# Altium PCB PCB1.PcbDoc
Units mm, origin at the board's own origin, x right, y up, seen from the top; angles counter-clockwise.
Board outline 77.34 x 133.99 mm, 2 copper layers (Top Layer, Bottom Layer); 15 components, 14 nets, 152 pads, 0 vias.
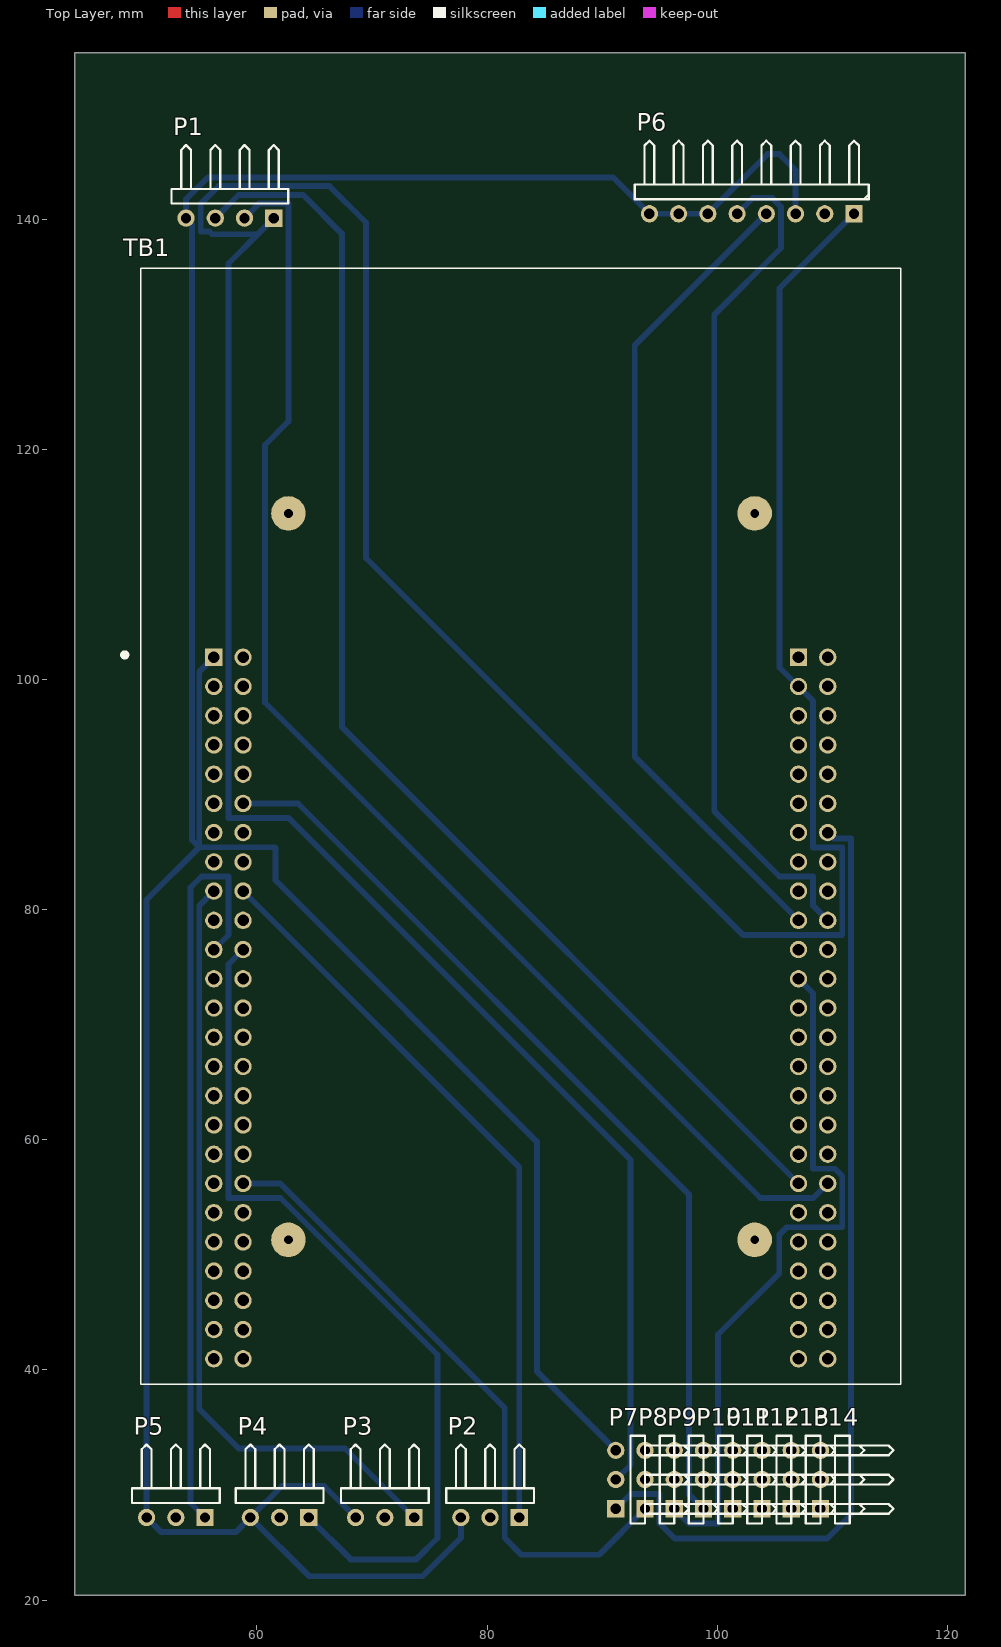
[diagram p0: Top Layer view]
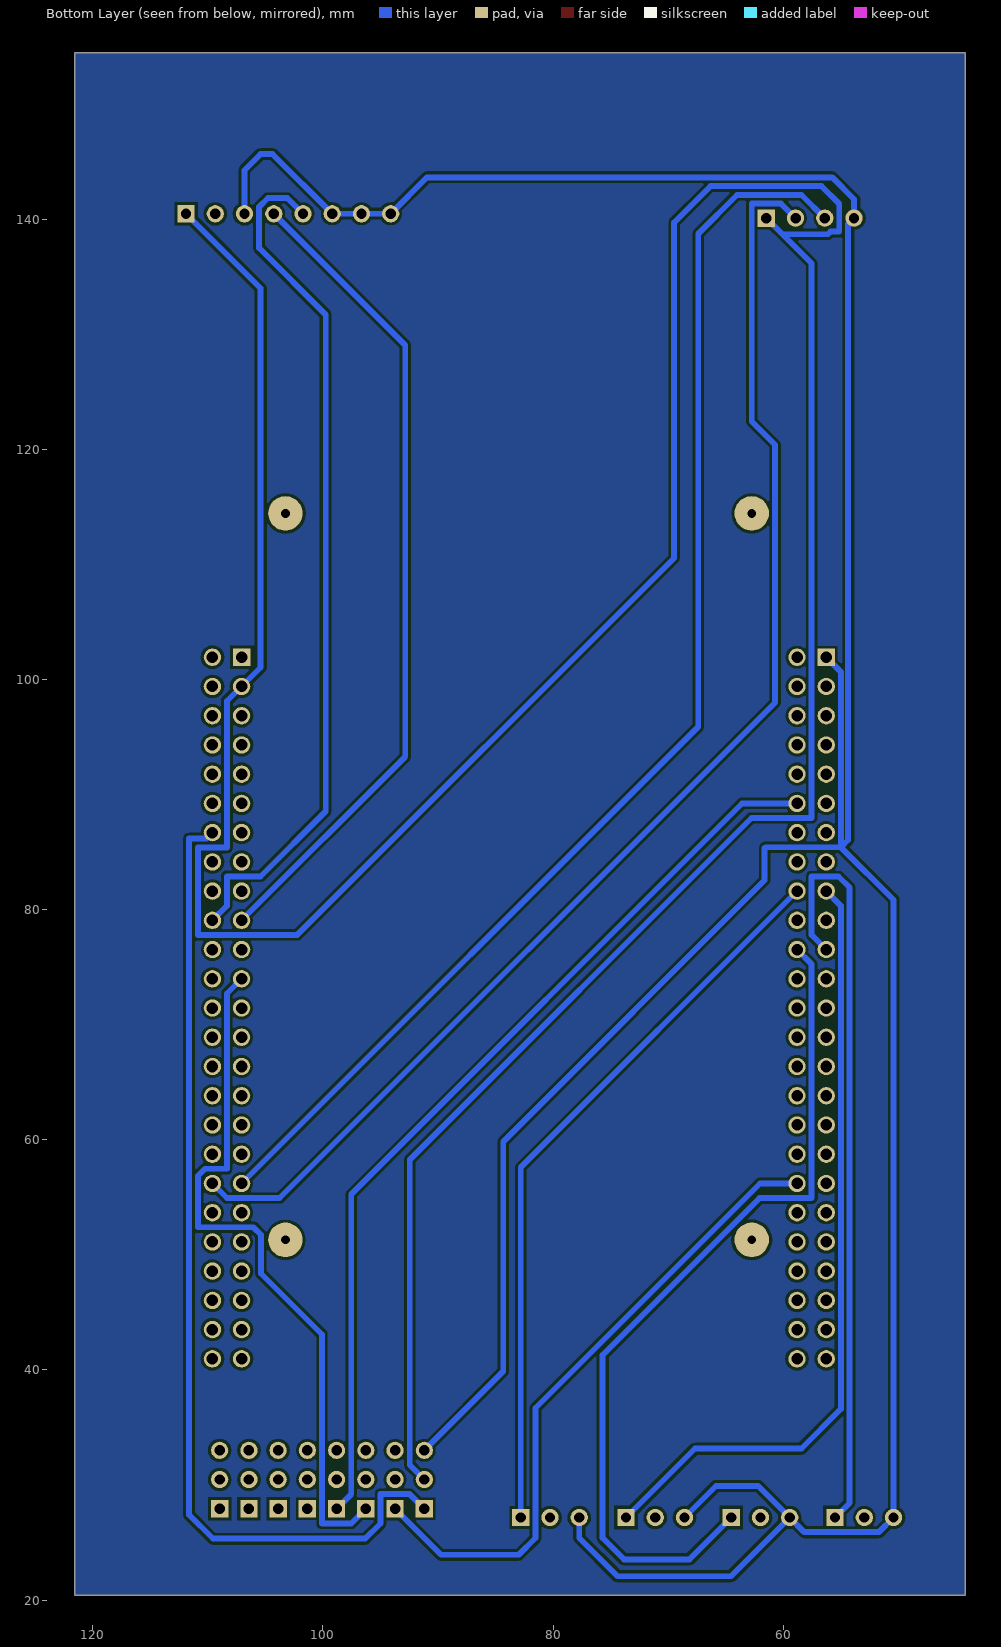
[diagram p1: Bottom Layer view, seen from below]

## Layer stack, top to bottom
Top Solder: solder mask 0.0102, Solder Resist, Dk 3.5
Top Layer: signal copper 0.0356
Dielectric 1: dielectric 0.32, FR-4, Dk 4.8
Bottom Layer: signal copper 0.0356
Bottom Solder: solder mask 0.0102, Solder Resist, Dk 3.5

## Board outline
44.196,20.447 121.539,20.447 121.539,154.432 44.196,154.432

## Design rules (kind name [scope] priority, off if disabled: settings)
Clearance [All] p1: gap=0.254 ignorepadtopadclearanceinfootprint=FALSE except(0: Arc-Hole Track-Hole SMDPad-Hole THPad-Hole Via-Hole Fill-Hole Poly-Hole Region-Hole Text-Hole)
PolygonConnect [All] p1: connectstyle=Relief reliefconductorwidth=0.254 reliefentries=4 polygonreliefangle="90 Angle" airgapwidth=0.254
RoomDefinition Sch [InComponentClass('Sch')] p1: confinementstyle=ConfineIn formatcopy=TRUE lockcomponents=FALSE outline 178.943,26.797 373.634,26.797 373.634,127.381 178.943,127.381
RoutingVias [All] p1: holewidth=0.711 width=1.27 viastyle="Through Hole" minholewidth=0.711 minwidth=1.27 maxholewidth=0.711 maxwidth=1.27
SolderMaskExpansion [All] p1: expansion=0.102
Width [All] p1: maxlimit=0.508 minlimit=0.508 preferedwidth=0.508
30 further rules are at their usual default settings.

## Components (designator, comment, footprint, x,y, rotation, side; value= is the part's Value field where it differs from the comment)
P1 "Header 4H" HDR1X4H 61.468,140.081 r180 top
P2 "Header 3H" HDR1X3H 82.804,27.178 r180 top
P3 "Header 3H" HDR1X3H 73.66,27.178 r180 top
P4 "Header 3H" HDR1X3H 64.516,27.178 r180 top
P5 "Header 3H" HDR1X3H 55.499,27.178 r180 top
P6 "Header 8H" HDR1X8H 111.887,140.462 r180 top
P7 "Header 3H" HDR1X3H 91.186,27.94 r90 top
P8 "Header 3H" HDR1X3H 93.726,27.94 r90 top
P9 "Header 3H" HDR1X3H 96.266,27.94 r90 top
P10 "Header 3H" HDR1X3H 98.806,27.94 r90 top
P11 "Header 3H" HDR1X3H 101.346,27.94 r90 top
P12 "Header 3H" HDR1X3H 103.886,27.94 r90 top
P13 "Header 3H" HDR1X3H 106.426,27.94 r90 top
P14 "Header 3H" HDR1X3H 108.966,27.94 r90 top
TB1 "STM32F4DISCOVERY" *MODULE_STM32F4DISCOVERY_STM32F4DISCOVERY(Primary) 82.931,87.249 r0 top

## Footprints (in the part's own frame and the unit in brackets; to place one, negate y for a bottom-side part, rotate by r counter-clockwise, add the part's x,y. Pads: shape width x height; smd on the part's side, far side on the other; paste and mask are expansions set on the pad)
*MODULE_STM32F4DISCOVERY_STM32F4DISCOVERY(Primary) [mm]
  rect 1.508x1.508 hole 1: P1_1(-26.67,14.68) P2_1(24.13,14.68)
  round 1.508 hole 1: P1_2(-24.13,14.68) P1_3(-26.67,12.14) P1_4(-24.13,12.14) P1_5(-26.67,9.6) P1_6(-24.13,9.6) P1_7(-26.67,7.06) P1_8(-24.13,7.06) P1_9(-26.67,4.52) P1_10(-24.13,4.52) P1_11(-26.67,1.98) P1_12(-24.13,1.98) P1_13(-26.67,-0.56) P1_14(-24.13,-0.56) P1_15(-26.67,-3.1) P1_16(-24.13,-3.1) P1_17(-26.67,-5.64) P1_18(-24.13,-5.64) P1_19(-26.67,-8.18) P1_20(-24.13,-8.18) P1_21(-26.67,-10.72) P1_22(-24.13,-10.72) P1_23(-26.67,-13.26) P1_24(-24.13,-13.26) P1_25(-26.67,-15.8) P1_26(-24.13,-15.8) P1_27(-26.67,-18.34) P1_28(-24.13,-18.34) P1_29(-26.67,-20.88) P1_30(-24.13,-20.88) P1_31(-26.67,-23.42) P1_32(-24.13,-23.42) P1_33(-26.67,-25.96) P1_34(-24.13,-25.96) P1_35(-26.67,-28.5) P1_36(-24.13,-28.5) P1_37(-26.67,-31.04) P1_38(-24.13,-31.04) P1_39(-26.67,-33.58) P1_40(-24.13,-33.58) P1_41(-26.67,-36.12) P1_42(-24.13,-36.12) P1_43(-26.67,-38.66) P1_44(-24.13,-38.66) P1_45(-26.67,-41.2) P1_46(-24.13,-41.2) P1_47(-26.67,-43.74) P1_48(-24.13,-43.74) P1_49(-26.67,-46.28) P1_50(-24.13,-46.28) P2_2(26.67,14.68) P2_3(24.13,12.14) P2_4(26.67,12.14) P2_5(24.13,9.6) P2_6(26.67,9.6) P2_7(24.13,7.06) P2_8(26.67,7.06) P2_9(24.13,4.52) P2_10(26.67,4.52) P2_11(24.13,1.98) P2_12(26.67,1.98) P2_13(24.13,-0.56) P2_14(26.67,-0.56) P2_15(24.13,-3.1) P2_16(26.67,-3.1) P2_17(24.13,-5.64) P2_18(26.67,-5.64) P2_19(24.13,-8.18) P2_20(26.67,-8.18) P2_21(24.13,-10.72) P2_22(26.67,-10.72) P2_23(24.13,-13.26) P2_24(26.67,-13.26) P2_25(24.13,-15.8) P2_26(26.67,-15.8) P2_27(24.13,-18.34) P2_28(26.67,-18.34) P2_29(24.13,-20.88) P2_30(26.67,-20.88) P2_31(24.13,-23.42) P2_32(26.67,-23.42) P2_33(24.13,-25.96) P2_34(26.67,-25.96) P2_35(24.13,-28.5) P2_36(26.67,-28.5) P2_37(24.13,-31.04) P2_38(26.67,-31.04) P2_39(24.13,-33.58) P2_40(26.67,-33.58) P2_41(24.13,-36.12) P2_42(26.67,-36.12) P2_43(24.13,-38.66) P2_44(26.67,-38.66) P2_45(24.13,-41.2) P2_46(26.67,-41.2) P2_47(24.13,-43.74) P2_48(26.67,-43.74) P2_49(24.13,-46.28) P2_50(26.67,-46.28)
  silkscreen extent -34.61,-48.5 33,48.5
HDR1X3H [mm] "Connector; Header; 3 Position; Right Angle"
  rect 1.5x1.5 hole 0.9: 1(0,0)
  round 1.5 hole 0.9: 2(2.54,0) 3(5.08,0)
  silkscreen extent -1.27,-6.35 6.35,-1.27
HDR1X4H [mm] "Connector; Header; 4 Position; Right Angle"
  rect 1.5x1.5 hole 0.9: 1(0,0)
  round 1.5 hole 0.9: 2(2.54,0) 3(5.08,0) 4(7.62,0)
  silkscreen extent -1.27,-6.35 8.89,-1.27
HDR1X8H [mm] "Connector; Header; 8 Position; Right Angle"
  rect 1.5x1.5 hole 0.9: 1(0,0)
  round 1.5 hole 0.9: 2(2.54,0) 3(5.08,0) 4(7.62,0) 5(10.16,0) 6(12.7,0) 7(15.24,0) 8(17.78,0)
  silkscreen extent -1.27,-6.35 19.05,-1.27

## Part data
P1: "Header, 4-Pin, Right Angle", LatestRevisionDate=17-Jul-2002, LatestRevisionNote="Re-released for DXP Platform.", Publisher="Altium Limited"
P2 P3 P4 P5 P7 P8 P9 P10 P11 P12 P13 P14: "Header, 3-Pin, Right Angle", LatestRevisionDate=17-Jul-2002, LatestRevisionNote="Re-released for DXP Platform.", Publisher="Altium Limited"
P6: "Header, 8-Pin, Right Angle", LatestRevisionDate=17-Jul-2002, LatestRevisionNote="Re-released for DXP Platform.", Publisher="Altium Limited"
TB1: "STM32F407VGT6 Discovery STM32F4 ARM® Cortex®-M4 MCU 32-Bit Embedded Evaluation Board", Package=None, Availability=Unavailable, MF=STMicroelectronics, MP=STM32F4DISCOVERY, Price=None, SnapEDA_Link=https://www.snapeda.com/parts/STM32F4DISCOVERY/STMicroelectronics/view-part/46335/?ref=snap

## Free pads (board coordinates)
  round 3 hole 0.762: 2(62.738,51.308) 2(62.738,114.427) 5(103.251,51.308) 5(103.251,114.427)

## Nets (pads, with @x,y where several pads share a name; then routed paths per layer and width w, separated by ;. In a path a pad name is that pad's centre, name@x,y a point inside that pad or via, vN(x,y) a via of type N, cw(c..) or ccw(c..) an arc to the next point about the centre after c; other vN are vias at no path point)
GND: P1.4 P2.3 P3.3 P4.3 P5.3 P6.3 P6.6 P6.7 P6.8 P7.3 TB1.P1_1 | length 311.8
  Bottom Layer w0.508: TB1.P1_1 54.991,100.659 54.991,85.42 ; P3.3 65.837,29.921 62.179,29.921 P4.3 ; P2.3 77.724,25.4 74.397,22.073 64.541,22.073 P4.3 ; P7.3 84.328,39.878 84.328,59.842 61.62,82.55 61.62,85.344 61.544,85.42 54.991,85.42 ; P6.3 106.807,144.247 105.41,145.644 104.369,145.644 P6.6 P6.7 P6.8 90.944,143.625 55.753,143.625 53.848,141.72 P1.4 54.368,139.561 54.368,86.043 54.991,85.42 ; 54.991,85.42 50.419,80.848 P5.3 51.689,25.908 58.166,25.908 P4.3
RX: P1.3 TB1.P2_37 | length 112.2
  Bottom Layer w0.508: P1.3 58.408,142.101 64.02,142.101 67.386,138.735 67.386,95.884 TB1.P2_37
SCL_GY85: P6.4 TB1.P2_19 | length 72
  Bottom Layer w0.508: P6.4 92.837,129.032 92.837,93.293 TB1.P2_19
SDA_GY85: P6.5 TB1.P2_20 | length 74.9
  Bottom Layer w0.508: P6.5 103.099,141.834 104.775,141.834 105.537,141.072 105.537,137.49 99.746,131.699 99.746,88.544 105.41,82.88 108.331,82.88 108.331,80.339 TB1.P2_20
Signal1_ESC: P2.1 TB1.P1_18 | length 64.4
  Bottom Layer w0.508: TB1.P1_18 82.804,57.606 P2.1
Signal1_MC6C: P7.1 TB1.P2_14 | length 85.9
  Bottom Layer w0.508: P7.1 92.456,29.21 94.996,29.21 94.996,26.67 96.317,25.349 109.55,25.349 111.625,27.424 111.625,86.173 110.117,86.173 TB1.P2_14
Signal2_ESC: P3.1 TB1.P1_17 | length 68.1
  Bottom Layer w0.508: TB1.P1_17 54.991,80.339 54.991,36.601 58.42,33.172 67.666,33.172 P3.1
Signal2_MC6C: P8.1 TB1.P1_38 | length 56.6
  Bottom Layer w0.508: TB1.P1_38 62.028,56.209 81.534,36.703 81.534,25.4 82.982,23.952 89.738,23.952 P8.1
Signal3_ESC: P4.1 TB1.P1_22 | length 75.3
  Bottom Layer w0.508: TB1.P1_22 57.531,75.259 57.531,54.94 62.052,54.94 75.692,41.3 75.692,25.4 73.838,23.546 68.148,23.546 P4.1
Signal3_MC6C: P9.1 TB1.P2_23 | length 61.6
  Bottom Layer w0.508: P9.1 97.536,26.67 100.076,26.67 100.076,43.078 105.385,48.387 105.385,51.747 106.045,52.407 110.863,52.407 110.863,56.853 110.236,57.48 108.331,57.48 108.331,72.719 TB1.P2_23
Signal4_ESC: P5.1 TB1.P1_21 | length 65.8
  Bottom Layer w0.508: P5.1 54.229,28.448 54.229,81.915 55.194,82.88 57.531,82.88 57.531,77.799 TB1.P1_21
Signal4_MC6C: P10.1 TB1.P1_12 | length 80.7
  Bottom Layer w0.508: TB1.P1_12 63.577,89.229 97.536,55.27 97.536,29.21 P10.1
TX: P1.2 TB1.P2_38 | length 115.8
  Bottom Layer w0.508: P1.2 60.186,141.339 62.738,141.339 62.738,122.403 60.706,120.371 60.706,97.993 103.759,54.94 108.332,54.94 TB1.P2_38
VCC: P1.1 P6.1 P7.2 TB1.P2_3 | length 306.2
  Bottom Layer w0.508: P1.1 60.071,138.684 ; P7.2 92.456,31.75 92.456,58.268 62.763,87.96 57.531,87.96 57.531,136.144 60.071,138.684 ; P6.1 105.41,133.985 105.41,101.04 TB1.P2_3 108.331,98.119 108.331,85.411 110.863,85.411 110.863,77.807 102.228,77.807 69.481,110.554 69.481,139.7 66.318,142.863 56.667,142.863 55.13,141.326 55.13,138.913 55.88,138.913 56.109,138.684 60.071,138.684
pads on no net: P2.2 P3.2 P4.2 P5.2 P6.2 P8.2 P8.3 P9.2 P9.3 P10.2 P10.3 P11.1 P11.2 P11.3 P12.1 P12.2 P12.3 P13.1 P13.2 P13.3 P14.1 P14.2 P14.3 TB1.P1_2 TB1.P1_3 TB1.P1_4 TB1.P1_5 TB1.P1_6 TB1.P1_7 TB1.P1_8 TB1.P1_9 TB1.P1_10 TB1.P1_11 TB1.P1_13 TB1.P1_14 TB1.P1_15 TB1.P1_16 TB1.P1_19 TB1.P1_20 TB1.P1_23 TB1.P1_24 TB1.P1_25 TB1.P1_26 TB1.P1_27 TB1.P1_28 TB1.P1_29 TB1.P1_30 TB1.P1_31 TB1.P1_32 TB1.P1_33 TB1.P1_34 TB1.P1_35 TB1.P1_36 TB1.P1_37 TB1.P1_39 TB1.P1_40 TB1.P1_41 TB1.P1_42 TB1.P1_43 TB1.P1_44 TB1.P1_45 TB1.P1_46 TB1.P1_47 TB1.P1_48 TB1.P1_49 TB1.P1_50 TB1.P2_1 TB1.P2_2 TB1.P2_4 TB1.P2_5 TB1.P2_6 TB1.P2_7 TB1.P2_8 TB1.P2_9 TB1.P2_10 TB1.P2_11 TB1.P2_12 TB1.P2_13 TB1.P2_15 TB1.P2_16 TB1.P2_17 TB1.P2_18 TB1.P2_21 TB1.P2_22 TB1.P2_24 TB1.P2_25 TB1.P2_26 TB1.P2_27 TB1.P2_28 TB1.P2_29 TB1.P2_30 TB1.P2_31 TB1.P2_32 TB1.P2_33 TB1.P2_34 TB1.P2_35 TB1.P2_36 TB1.P2_39 TB1.P2_40 TB1.P2_41 TB1.P2_42 TB1.P2_43 TB1.P2_44 TB1.P2_45 TB1.P2_46 TB1.P2_47 TB1.P2_48 TB1.P2_49 TB1.P2_50

## Polygon pours and split planes (outlines as drawn)
no net on Bottom Layer (solid, pour order 2): 43.688,18.923
no net on Bottom Layer (solid, pour order 0): 44.196,154.432 121.539,154.432 121.539,20.447 44.196,20.447